# Altium PCB CBU-PCB.PcbDoc (part 1 of 2)
Units mm, origin at the board's own origin, x right, y up, seen from the top; angles counter-clockwise.
Board outline 133.83 x 85.72 mm, 4 copper layers (Top, GND, PWR, Bottom), stack 1.585 mm thick; 138 components, 74 nets, 476 pads, 131 vias.
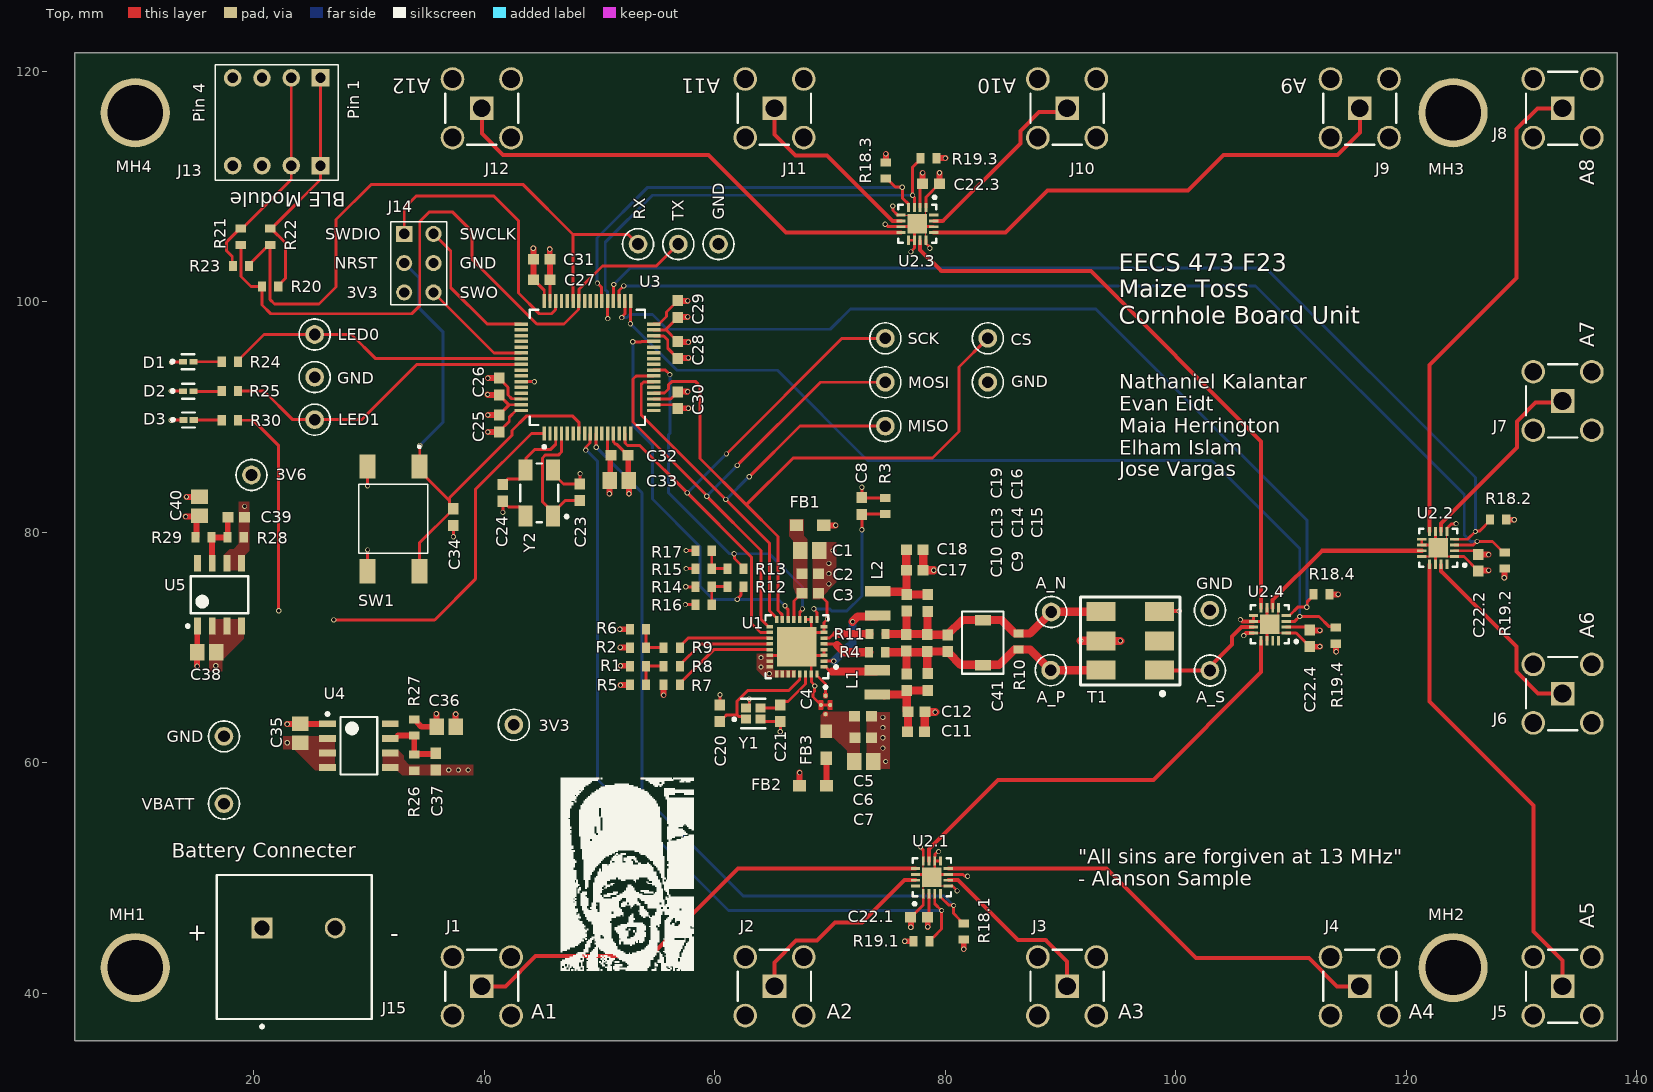
[diagram p0: Top view]
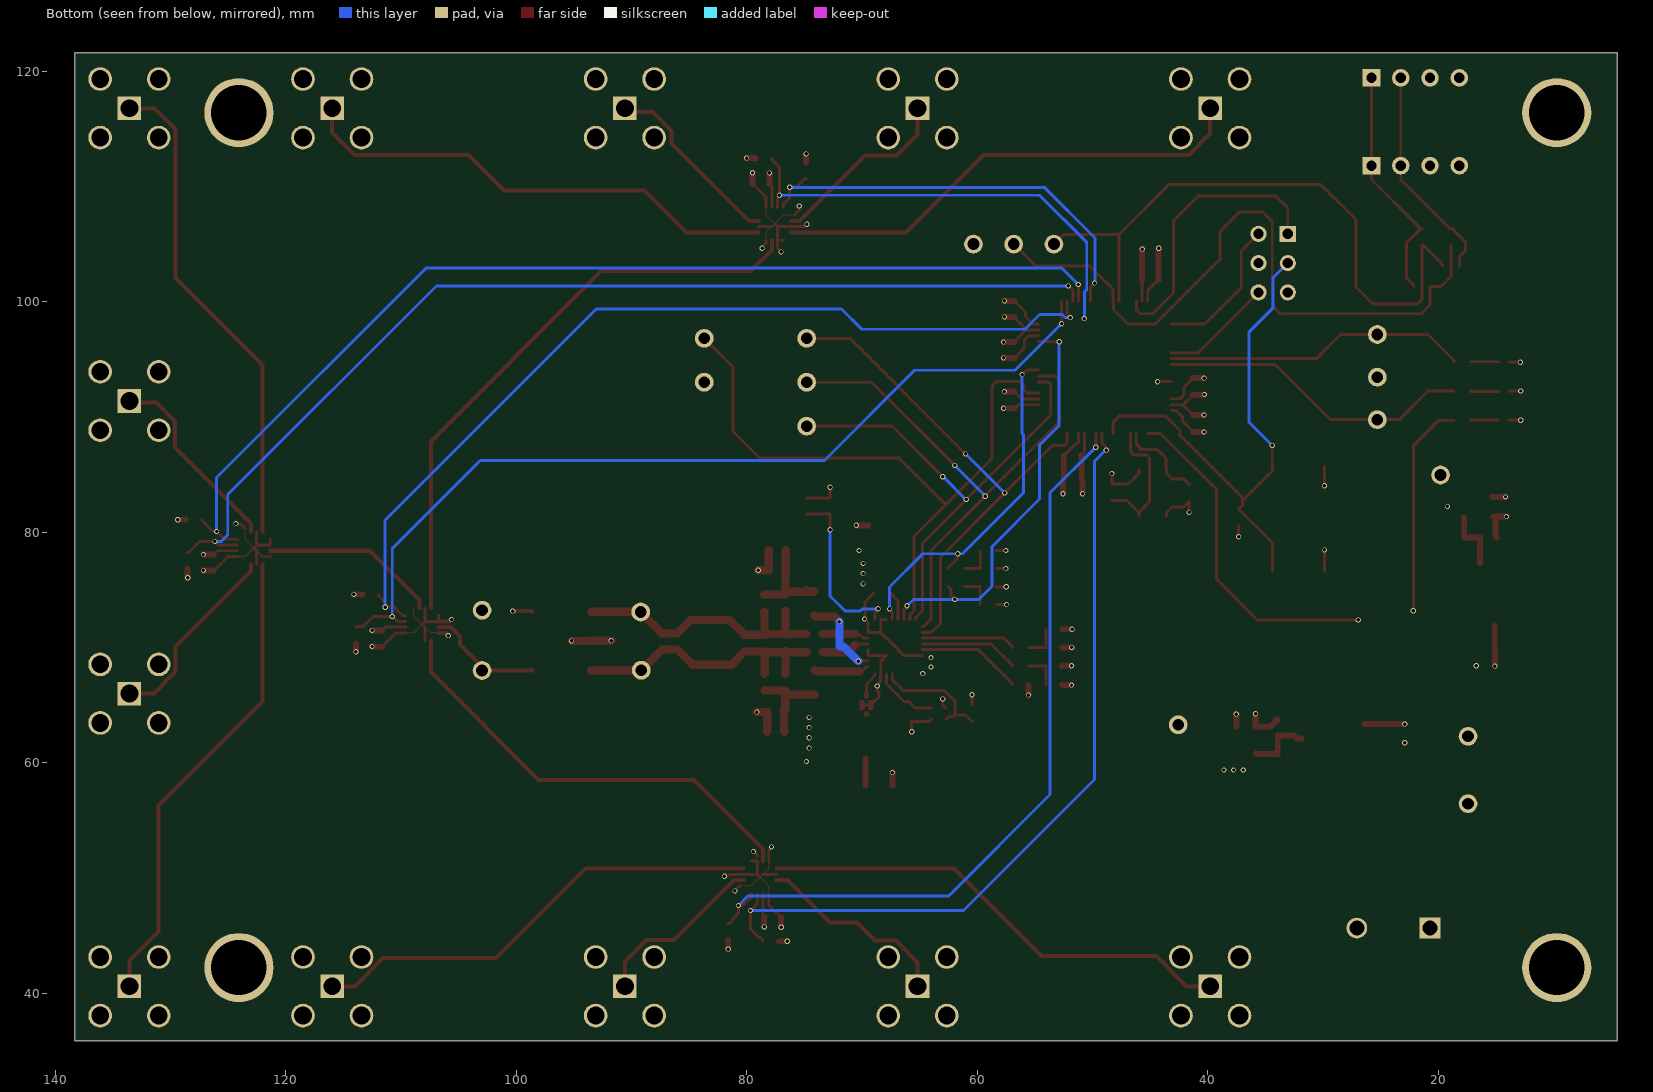
[diagram p1: Bottom view, seen from below]
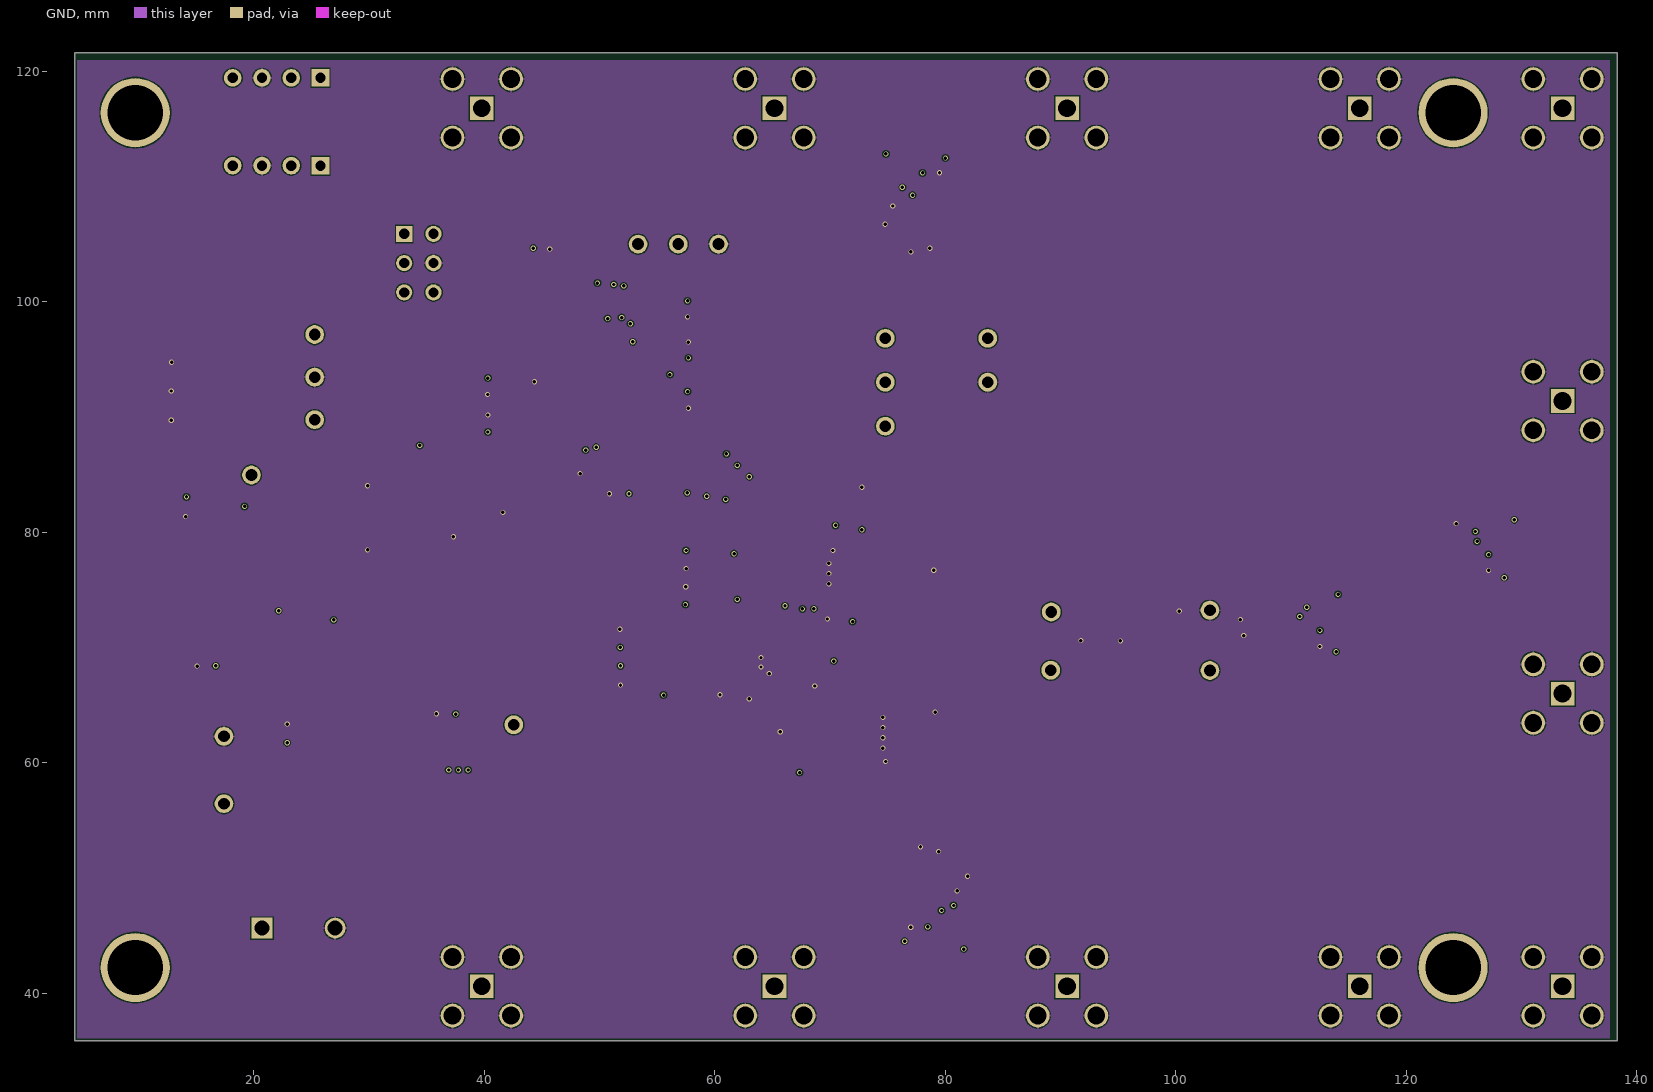
[diagram p2: GND]
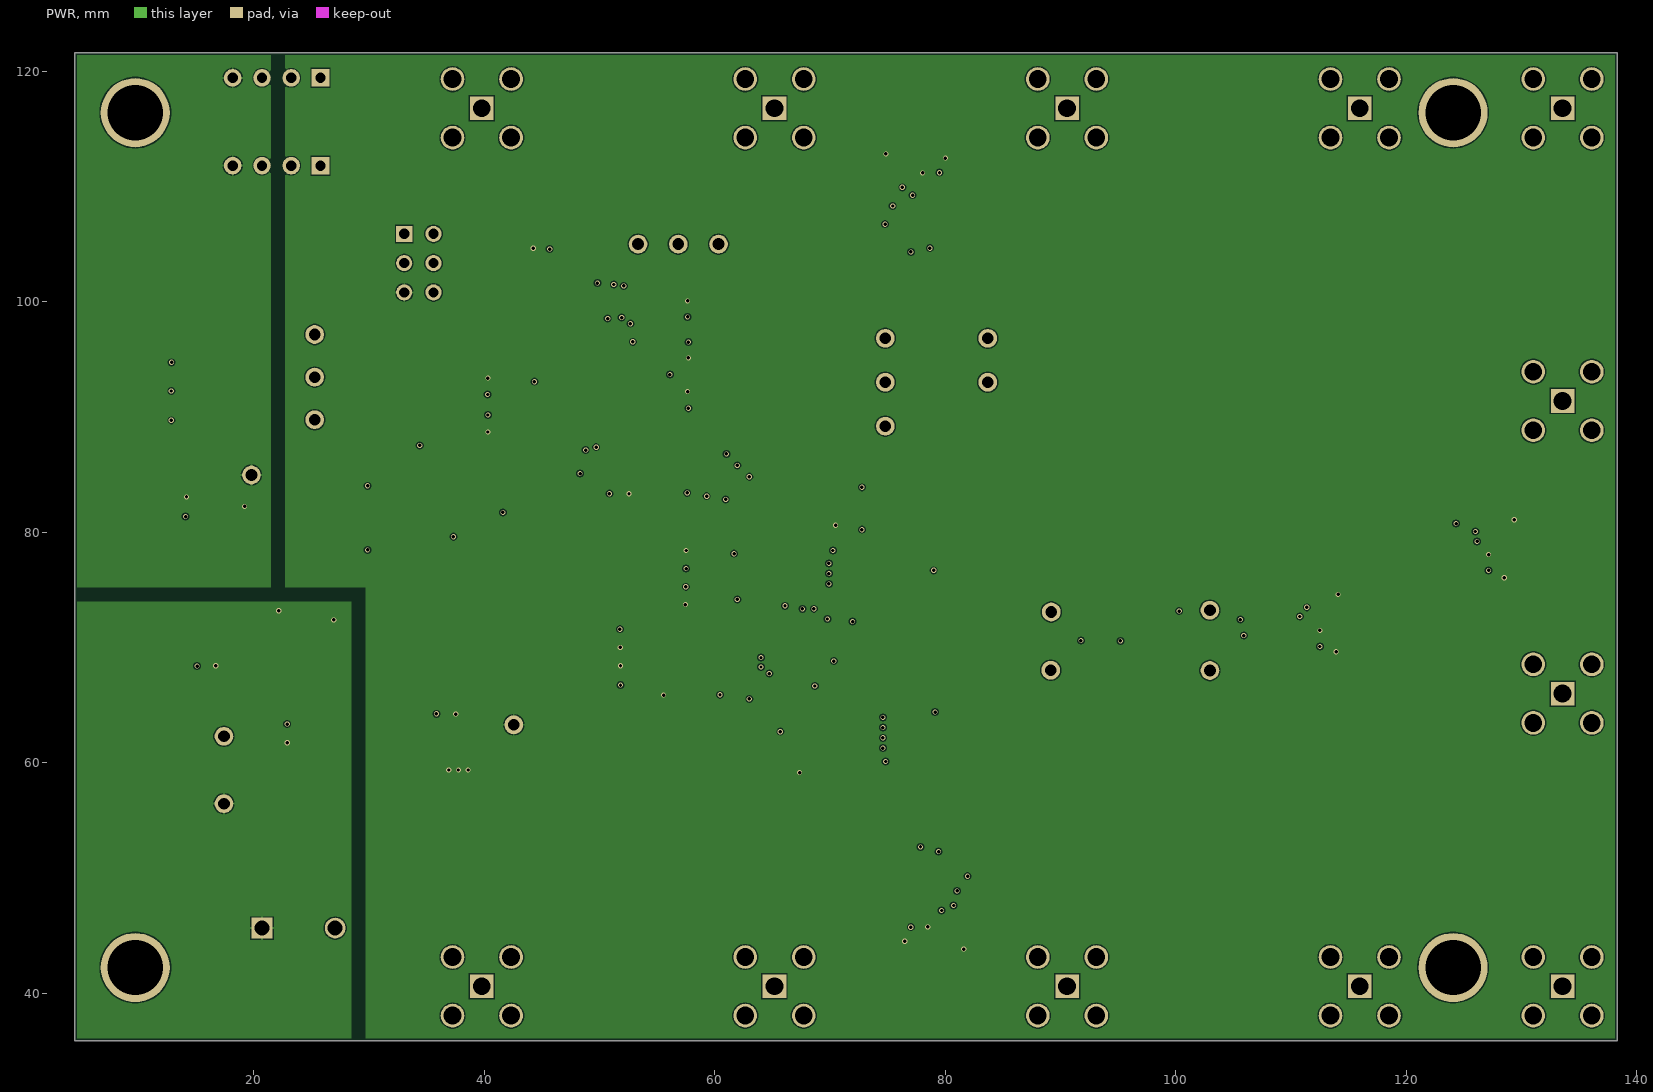
[diagram p3: PWR]
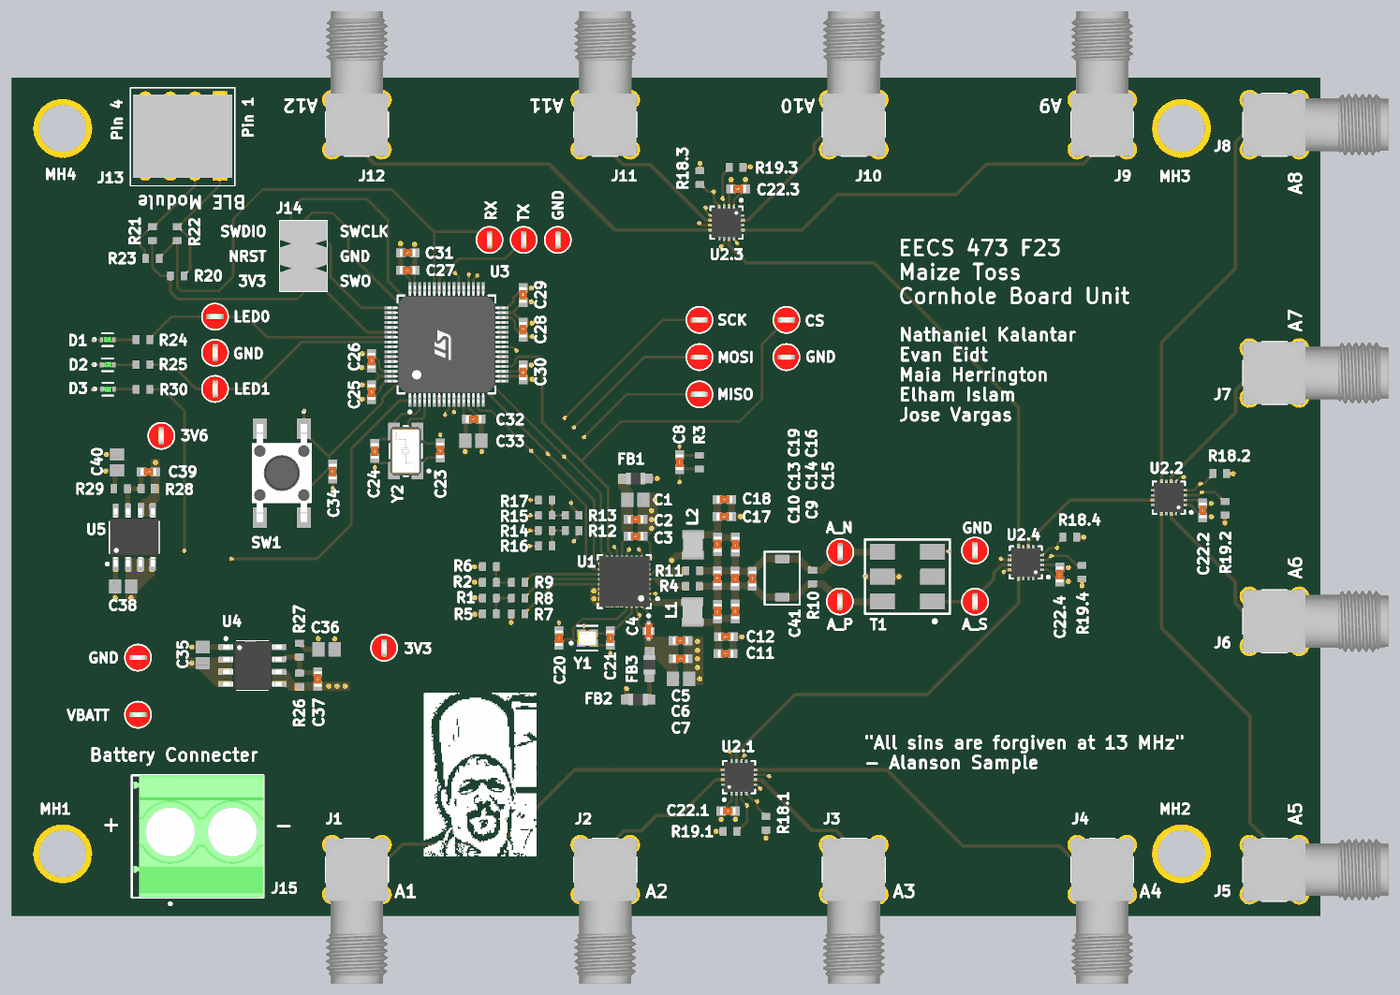
[diagram p5: 3D render of the assembled board from above, using the file's embedded part models]

## Layer stack, top to bottom
Top Solder: solder mask 0.0102, Solder Resist, Dk 3.5
Top: signal copper 0.035
Dielectric 2: prepreg 0.2104, PP-006, Dk 4.1
GND: signal copper 0.0152
Core: core 1.064, FR-4, Dk 4.8
PWR: signal copper 0.0152
Dielectric 3: prepreg 0.2104, PP-006, Dk 4.1
Bottom: signal copper 0.035
Bottom Solder: solder mask 0.0102, Solder Resist, Dk 3.5

## Board outline
4.47,35.865 138.303,35.865 138.303,121.59 4.47,121.59

## Design rules (kind name [scope] priority, off if disabled: settings)
BoardOutlineClearance [All] p1: gap=0.2 ignorepadtopadclearanceinfootprint=FALSE
Clearance Clearance_DiffNets [All] p1: gap=0.102 ignorepadtopadclearanceinfootprint=FALSE except(0.09: Arc-Arc Arc-Track Track-Track; 0.127: SMDPad-SMDPad; 0.15: SMDPad-Text THPad-Text; 0.2: Arc-SMDPad Arc-THPad Track-SMDPad Track-THPad; 0.254: Arc-Via Track-Via; 0.33: Arc-Hole Track-Hole; 0.5: SMDPad-THPad SMDPad-Hole THPad-THPad THPad-Via THPad-Hole Via-Hole)
Clearance Clearance_SameNets [All] p2: gap=0.102 ignorepadtopadclearanceinfootprint=FALSE except(0.254: Via-Via)
ComponentClearance [All] p1: gap=0.102 collisioncheckmode=3 verticalgap=0.102 showdistances=TRUE
DiffPairsRouting DiffPair_DiffPairsRouting [InDifferentialPair ('ANTENNA')] p1: maxlimit=0.254 minlimit=0.102 mostfreqgap=0.102 toplayer_minwidth=0.721 toplayer_maxwidth=0.721 toplayer_prefwidth=0.721 midlayer1_minwidth=0.721 midlayer1_maxwidth=0.721 midlayer1_prefwidth=0.721 midlayer2_minwidth=0.721 midlayer2_maxwidth=0.721 midlayer2_prefwidth=0.721 bottomlayer_minwidth=0.721 bottomlayer_maxwidth=0.721 bottomlayer_prefwidth=0.721 maxuncoupledlength=12.7
DiffPairsRouting [All] p2: maxlimit=0.102 minlimit=0.102 mostfreqgap=0.102 toplayer_minwidth=0.102 toplayer_maxwidth=1816.048 toplayer_prefwidth=0.102 midlayer1_minwidth=0.102 midlayer1_maxwidth=1816.048 midlayer1_prefwidth=0.102 midlayer2_minwidth=0.102 midlayer2_maxwidth=1816.048 midlayer2_prefwidth=0.102 bottomlayer_minwidth=0.102 bottomlayer_maxwidth=1816.048 bottomlayer_prefwidth=0.102 maxuncoupledlength=12.7
Height [All] p1: minheight=0 maxheight=1816.048 prefheight=12.7
HoleSize [All] p1: absolutevalues=TRUE maxlimit=6.3 minlimit=0.3 maxpercent=80.000 minpercent=20.000
HoleToHoleClearance [All] p1: gap=0.25 allowstackedmicrovias=FALSE
MatchedLengths DiffPair_MatchedLengths [InDifferentialPair ('ANTENNA')] p1: tolerance=25.4 checknetsindiffpair=FALSE checkdiffpairvsdiffpair=TRUE checkxsignals=TRUE checkothers=TRUE
MinimumAnnularRing [All] p1: minimumring=0.074
MinimumSolderMaskSliver [All] p1: minsoldermaskwidth=0
PlaneClearance [All] p1: clearance=0.102
PlaneConnect PlaneConnectPowerPads [InPadClass('PowerPads')] p1: planeconnectstyle=Direct reliefexpansion=0.508 reliefentries=4 reliefconductorwidth=0.254 reliefairgap=0.254
PlaneConnect [All] p2: pad.planeconnectstyle=Relief pad.reliefexpansion=0.3 pad.reliefentries=4 pad.reliefconductorwidth=0.102 pad.reliefairgap=0.102 via.planeconnectstyle=Direct via.reliefexpansion=0.3 via.reliefentries=4 via.reliefconductorwidth=0.127 via.reliefairgap=0.127
PolygonConnect PolygonConnect_GND [InNet('GND') Or InNet('3V3') Or InNet('3V6') Or InNet('VBATT') Or InNet('NetC4_3') Or InNet('NetC1_1')] p1: thpad.connectstyle=Relief thpad.reliefconductorwidth=0.203 thpad.reliefentries=4 thpad.polygonreliefangle="90 Angle" thpad.airgapwidth=0.102 smdpad.connectstyle=Direct smdpad.reliefconductorwidth=0.102 smdpad.reliefentries=4 smdpad.polygonreliefangle="90 Angle" smdpad.airgapwidth=0.102 via.connectstyle=Direct via.reliefconductorwidth=0.102 via.reliefentries=4 via.polygonreliefangle="90 Angle" via.airgapwidth=0.102
PolygonConnect PolygonConnectPowerPads [All vs (InPadClass('PowerPads'))] p2: connectstyle=Direct reliefconductorwidth=0.254 reliefentries=4 polygonreliefangle="90 Angle" airgapwidth=0.254
PolygonConnect [All] p3: thpad.connectstyle=Relief thpad.reliefconductorwidth=0.203 thpad.reliefentries=4 thpad.polygonreliefangle="90 Angle" thpad.airgapwidth=0.102 smdpad.connectstyle=Relief smdpad.reliefconductorwidth=0.203 smdpad.reliefentries=4 smdpad.polygonreliefangle="90 Angle" smdpad.airgapwidth=0.102 via.connectstyle=Direct via.reliefconductorwidth=0.127 via.reliefentries=4 via.polygonreliefangle="90 Angle" via.airgapwidth=0.127
RoutingVias [All] p1: holewidth=0.3 width=0.45 viastyle="Through Hole" minholewidth=0.3 minwidth=0.45 maxholewidth=6.3 maxwidth=6.55
SilkToSilkClearance [All] p1: silktosilkclearance=0
SilkToSolderMaskClearance [IsPad] p1: minsilkscreentomaskgap=0.102 clearancetoexposedcopper=TRUE
SolderMaskExpansion [All] p1: expansion=0.038 istentingtop=FALSE
Width Width_1 [Not InNetClass('50OhmMicrostrip')] p1: maxlimit=1.27 minlimit=0.102 preferedwidth=0.254 minimp=50.000000 maximp=50.000000 favimp=50.000000
20 further rules are at their usual default settings.

## Classes and differential pairs
component class CBU: MH1 MH2 MH3 MH4
channel class "RF Switch": Switch1 Switch2 Switch3 Switch4
net class SEL[7..0]: SEL0 SEL1 SEL2 SEL3 SEL4 SEL5 SEL6 SEL7
net class RF[11..0]: RF0 RF1 RF2 RF3 RF4 RF5 RF6 RF7 RF8 RF9 RF10 RF11
component class "Switch Network": A_N A_P A_S T1
component class Switch4: C22.4 R18.4 R19.4 U2.4
component class Switch3: C22.3 R18.3 R19.3 U2.3
component class Switch2: C22.2 R18.2 R19.2 U2.2
component class Switch1: C22.1 R18.1 R19.1 U2.1
component class "RFID Reader": C1 C2 C3 C4 C5 C6 C7 C8 C9 C10 C11 C12 C13 C14 C15 C16 C17 C18 C19 C20 C21 C41 FB1 FB2 FB3 L1 L2 R1 R2 R3 R4 R5 R6 R7 R8 R9 R10 R11 R12 R13 R14 R15 R16 R17 U1 Y1
component class "Power Regulation": 3V6 C35 C36 C37 C38 C39 C40 D3 J15 R26 R27 R28 R29 R30 U4 U5 VBATT
component class Microcontroller: C23 C24 C25 C26 C27 C28 C29 C30 C31 C32 C33 C34 CS D1 D2 GND J13 J14 LED0 LED1 MISO MOSI R20 R21 R22 R23 R24 R25 Rx SCK SW1 Tx U3 Y2
component class "Antenna Connectors": J1 J2 J3 J4 J5 J6 J7 J8 J9 J10 J11 J12
differential pair ANTENNA: +ANTENNA_P -ANTENNA_N

## Components (designator, comment, footprint, x,y, rotation, side; value= is the part's Value field where it differs from the comment)
3V3 "5000" FP-5000-MFG 42.557,63.283 r90 top (schematic designator TP14)
3V6 "5000" FP-5000-MFG 19.787,84.963 r90 top (schematic designator TP15)
A_N "5000" FP-5000-MFG 89.205,73.076 r90 top (schematic designator TP18)
A_P "5000" FP-5000-MFG 89.154,68.021 r90 top (schematic designator TP16)
A_S "5000" FP-5000-MFG 102.972,67.996 r90 top (schematic designator TP17)
C1 "Ceramic Capacitor 0805" FP-0805-Capacitor-CL21-IPC_B 68.25,78.41 r0 top value=1u
C2 "Ceramic Capacitor 0603" FP-0603-Capacitor-CL10-IPC_B 68.275,76.412 r0 top value=100n
C3 "Ceramic Capacitor 0603" FP-0603-Capacitor-CL10-IPC_B 68.275,74.698 r0 top value=10n
C4 "NFM18PS105R0J3D" FP-NFM18-0_1-e0_05_0_35-MFG 69.61,65.004 r270 top
C5 "Ceramic Capacitor 0603" FP-0603-Capacitor-CL10-IPC_B 72.866,64.008 r0 top value=10n
C6 "Ceramic Capacitor 0603" FP-0603-Capacitor-CL10-IPC_B 72.882,62.179 r0 top value=100n
C7 "Ceramic Capacitor 0805" FP-0805-Capacitor-CL21-IPC_B 72.923,60.096 r0 top value=1u
C8 "Ceramic Capacitor 0603" FP-0603-Capacitor-CL10-IPC_B 72.771,82.271 r270 top value=10n
C9 "Ceramic Capacitor 0603" FP-0603-Capacitor-CL10-IPC_B 78.461,66.997 r90 top value=NC
C10 "Ceramic Capacitor 0603" FP-0603-Capacitor-CL10-IPC_B 76.657,66.981 r90 top value=47p
C11 "Ceramic Capacitor 0603" FP-0603-Capacitor-CL10-IPC_B 77.47,62.679 r0 top value=100p
C12 "Ceramic Capacitor 0603" FP-0603-Capacitor-CL10-IPC_B 77.505,64.406 r0 top value=100p
C13 "Ceramic Capacitor 0603" FP-0603-Capacitor-CL10-IPC_B 76.632,70.401 r270 top value=82p
C14 "Ceramic Capacitor 0603" FP-0603-Capacitor-CL10-IPC_B 78.435,70.375 r90 top value=NC
C15 "Ceramic Capacitor 0603" FP-0603-Capacitor-CL10-IPC_B 80.213,70.359 r90 top value=NC
C16 "Ceramic Capacitor 0603" FP-0603-Capacitor-CL10-IPC_B 78.486,73.845 r270 top value=47p
C17 "Ceramic Capacitor 0603" FP-0603-Capacitor-CL10-IPC_B 77.349,76.708 r180 top value=100p
C18 "Ceramic Capacitor 0603" FP-0603-Capacitor-CL10-IPC_B 77.359,78.461 r180 top value=100p
C19 "Ceramic Capacitor 0603" FP-0603-Capacitor-CL10-IPC_B 76.657,73.871 r270 top value=NC
C20 "Ceramic Capacitor 0603" FP-0603-Capacitor-CL10-IPC_B 60.441,64.28 r90 top value=10p
C21 "Ceramic Capacitor 0603" FP-0603-Capacitor-CL10-IPC_B 65.673,64.29 r270 top value=10p
C22.1 "Ceramic Capacitor 0603" FP-0603-Capacitor-CL10-IPC_B 77.724,46.584 r180 top value=100n (schematic designator C22)
C22.2 "Ceramic Capacitor 0603" FP-0603-Capacitor-CL10-IPC_B 126.263,77.343 r270 top value=100n (schematic designator C22)
C22.3 "Ceramic Capacitor 0603" FP-0603-Capacitor-CL10-IPC_B 78.765,110.221 r0 top value=100n (schematic designator C22)
C22.4 "Ceramic Capacitor 0603" FP-0603-Capacitor-CL10-IPC_B 111.633,70.79 r270 top value=100n (schematic designator C22)
C23 "Ceramic Capacitor 0603" FP-0603-Capacitor-CL10-IPC_B 48.297,83.464 r90 top value=16p
C24 "Ceramic Capacitor 0603" FP-0603-Capacitor-CL10-IPC_B 41.605,83.414 r270 top value=16p
C25 "Ceramic Capacitor 0603" FP-0603-Capacitor-CL10-IPC_B 41.275,89.433 r90 top value=100n
C26 "Ceramic Capacitor 0603" FP-0603-Capacitor-CL10-IPC_B 41.275,92.647 r270 top value=100n
C27 "Ceramic Capacitor 0603" FP-0603-Capacitor-CL10-IPC_B 44.983,101.905 r0 top value=100n
C28 "Ceramic Capacitor 0603" FP-0603-Capacitor-CL10-IPC_B 56.769,99.365 r270 top value=100n
C29 "Ceramic Capacitor 0603" FP-0603-Capacitor-CL10-IPC_B 56.769,95.809 r90 top value=100n
C30 "Ceramic Capacitor 0603" FP-0603-Capacitor-CL10-IPC_B 56.769,91.456 r270 top value=100n
C31 "Ceramic Capacitor 0603" FP-0603-Capacitor-CL10-IPC_B 44.983,103.683 r0 top value=4.7n
C32 "Ceramic Capacitor 0603" FP-0603-Capacitor-CL10-IPC_B 51.724,86.665 r180 top value=10n
C33 "Ceramic Capacitor 0805" FP-0805-Capacitor-CL21-IPC_B 51.689,84.48 r180 top value=1u
C34 "Ceramic Capacitor 0603" FP-0603-Capacitor-CL10-IPC_B 37.313,81.305 r270 top value=100n
C35 "Ceramic Capacitor 0805" FP-0805-Capacitor-CL21-IPC_B 24.028,62.535 r90 top value=1u
C36 "Ceramic Capacitor 0603" FP-0603-Capacitor-CL10-IPC_B 35.789,60.087 r90 top value=68p
C37 "Ceramic Capacitor 0805" FP-0805-Capacitor-CL21-IPC_B 36.678,63.119 r180 top value=1u
C38 "Ceramic Capacitor 0805" FP-0805-Capacitor-CL21-IPC_B 15.888,69.571 r180 top value=1u
C39 "Ceramic Capacitor 0603" FP-0603-Capacitor-CL10-IPC_B 18.466,81.28 r180 top value=68p
C40 "Ceramic Capacitor 0805" FP-0805-Capacitor-CL21-IPC_B 15.265,82.245 r270 top value=1u
C41 "JZ500" JZXXX_Trim_Capacitor 83.261,70.409 r270 top
CS "5000" FP-5000-MFG 83.693,96.825 r0 top (schematic designator TP4)
D1 "APG1005CGC-T" FP-APG1005CGC-T-MFG 14.293,94.793 r0 top
D2 "APG1005CGC-T" FP-APG1005CGC-T-MFG 14.3,92.227 r0 top
D3 "APG1005CGC-T" FP-APG1005CGC-T-MFG 14.326,89.738 r0 top
FB1 "742792042" 742792042 68.275,80.594 r0 top
FB2 "742792042" 742792042 68.518,57.991 r180 top
FB3 "742792042" 742792042 69.686,61.547 r270 top
GND "5000" FP-5000-MFG 102.972,73.228 r90 top (schematic designator TP19)
GND "5000" FP-5000-MFG 25.273,93.459 r90 top (schematic designator TP13)
GND "5000" FP-5000-MFG 17.399,62.281 r0 top (schematic designator TP11)
GND "5000" FP-5000-MFG 60.325,105.004 r90 top (schematic designator TP8)
GND "5000" FP-5000-MFG 83.693,93.015 r0 top (schematic designator TP5)
J1 "731000114" 731000114_V 39.776,40.589 r90 top
J2 "731000114" 731000114_V 65.176,40.589 r90 top
J3 "731000114" 731000114_V 90.576,40.589 r90 top
J4 "731000114" 731000114_V 115.976,40.589 r90 top
J5 "731000114" 731000114_V 133.579,40.589 r180 top
J6 "731000114" 731000114_V 133.579,65.989 r180 top
J7 "731000114" 731000114_V 133.579,91.389 r180 top
J8 "731000114" 731000114_V 133.579,116.789 r180 top
J9 "731000114" 731000114_V 115.976,116.789 r270 top
J10 "731000114" 731000114_V 90.576,116.789 r270 top
J11 "731000114" 731000114_V 65.176,116.789 r270 top
J12 "731000114" 731000114_V 39.776,116.789 r270 top
J13 "0901481104" 0901481104 25.781,111.811 r0 top
J14 "5-146256-3" TE_5-146256-3 34.315,103.353 r270 top
J15 "1714955" 1714955 23.876,45.644 r0 top
L1 "744762256A" 744762256A 74.092,66.963 r270 top
L2 "744762256A" 744762256A 74.143,73.821 r90 top
LED0 "5000" FP-5000-MFG 25.273,97.155 r0 top (schematic designator TP9)
LED1 "5000" FP-5000-MFG 25.273,89.764 r90 top (schematic designator TP10)
MH1 "M4 Mounting Hole" "M4 Mounting Hole" 9.703,42.215 r0 top
MH2 "M4 Mounting Hole" "M4 Mounting Hole" 124.079,42.215 r0 top
MH3 "M4 Mounting Hole" "M4 Mounting Hole" 124.079,116.408 r0 top
MH4 "M4 Mounting Hole" "M4 Mounting Hole" 9.703,116.408 r0 top
MISO "5000" FP-5000-MFG 74.803,89.205 r0 top (schematic designator TP2)
MOSI "5000" FP-5000-MFG 74.803,93.015 r0 top (schematic designator TP3)
R1 "RC0603FR-072K2L" RESC1608X55X25NL10T15 53.326,68.368 r180 top value=NC
R2 "RC0603FR-072K2L" RESC1608X55X25NL10T15 53.326,69.977 r180 top value=0
R3 "RC0603FR-072K2L" RESC1608X55X25NL10T15 74.803,82.271 r270 top value=NC
R4 "RC0603FR-072K2L" RESC1608X55X25NL10T15 74.092,69.588 r180 top value=330
R5 "RC0603FR-072K2L" RESC1608X55X25NL10T15 53.326,66.76 r0 top value=0
R6 "RC0603FR-072K2L" RESC1608X55X25NL10T15 53.326,71.586 r0 top value=NC
R7 "RC0603FR-072K2L" RESC1608X55X25NL10T15 56.261,66.76 r180 top value=3.3k
R8 "RC0603FR-072K2L" RESC1608X55X25NL10T15 56.261,68.368 r180 top value=3.3k
R9 "RC0603FR-072K2L" RESC1608X55X25NL10T15 56.261,69.977 r180 top value=3.3k
R10 "RC0603FR-072K2L" RESC1608X55X25NL10T15 86.36,70.51 r270 top value=NC
R11 "RC0603FR-072K2L" RESC1608X55X25NL10T15 74.117,71.163 r180 top value=330
R12 "RC0603FR-072K2L" RESC1608X55X25NL10T15 61.787,75.273 r180 top value=3.3k
R13 "RC0603FR-072K2L" RESC1608X55X25NL10T15 61.787,76.832 r180 top value=3.3k
R14 "RC0603FR-072K2L" RESC1608X55X25NL10T15 59.035,75.273 r0 top value=NC
R15 "RC0603FR-072K2L" RESC1608X55X25NL10T15 59.035,76.832 r0 top value=NC
R16 "RC0603FR-072K2L" RESC1608X55X25NL10T15 59.035,73.713 r180 top value=0
R17 "RC0603FR-072K2L" RESC1608X55X25NL10T15 59.035,78.392 r180 top value=0
R18.1 "RC0603FR-072K2L" RESC1608X55X25NL10T15 81.61,45.331 r270 top value=1M (schematic designator R18)
R18.2 "RC0603FR-072K2L" RESC1608X55X25NL10T15 127.991,81.102 r0 top value=1M (schematic designator R18)
R18.3 "RC0603FR-072K2L" RESC1608X55X25NL10T15 74.832,111.388 r90 top value=1M (schematic designator R18)
R18.4 "RC0603FR-072K2L" RESC1608X55X25NL10T15 112.657,74.6 r0 top value=1M (schematic designator R18)
R19.1 "RC0603FR-072K2L" RESC1608X55X25NL10T15 77.927,44.501 r180 top value=1M (schematic designator R19)
R19.2 "RC0603FR-072K2L" RESC1608X55X25NL10T15 128.549,77.546 r270 top value=1M (schematic designator R19)
R19.3 "RC0603FR-072K2L" RESC1608X55X25NL10T15 78.537,112.446 r0 top value=1M (schematic designator R19)
R19.4 "RC0603FR-072K2L" RESC1608X55X25NL10T15 113.894,71.018 r270 top value=1M (schematic designator R19)
R20 "RC0603FR-072K2L" RESC1608X55X25NL10T15 21.412,101.321 r180 top value=NC
R21 "RC0603FR-072K2L" RESC1608X55X25NL10T15 18.872,105.639 r90 top value=0
R22 "RC0603FR-072K2L" RESC1608X55X25NL10T15 21.412,105.639 r270 top value=0
R23 "RC0603FR-072K2L" RESC1608X55X25NL10T15 18.872,103.099 r180 top value=NC
R24 "RC0603FR-072K2L" RESC1608X55X25NL10T15 17.907,94.793 r0 top value=1k
R25 "RC0603FR-072K2L" RESC1608X55X25NL10T15 17.907,92.253 r0 top value=1k
R26 "RC0603FR-072K2L" RESC1608X55X25NL10T15 33.909,59.995 r270 top value=51.1k
R27 "RC0603FR-072K2L" RESC1608X55X25NL10T15 33.909,63.043 r270 top value=31.2k
R28 "RC0603FR-072K2L" RESC1608X55X25NL10T15 18.415,79.553 r0 top value=51.1k
R29 "RC0603FR-072K2L" RESC1608X55X25NL10T15 15.621,79.553 r0 top value=27.1k
R30 "RC0603FR-072K2L" RESC1608X55X25NL10T15 17.907,89.713 r0 top value=1k
RX "5000" FP-5000-MFG 53.34,105.004 r90 top (schematic designator TP7)
SCK "5000" FP-5000-MFG 74.803,96.825 r0 top (schematic designator TP1)
SW1 "TS04-66-50-BK-260-SMT" SW_TS04-66-50-BK-260-SMT 32.106,81.153 r270 top
T1 "ADT1-6T+" ADT1-6T+ 93.524,68.021 r90 top
TX "5000" FP-5000-MFG 56.832,105.004 r90 top (schematic designator TP6)
U1 "ST25R95-VMD5T" ST25R95-VMD5T 67.121,70.056 r180 top
U2.1 "PE42440MLBB-Z" PE42440MLBB-Z 78.842,50.046 r90 top (schematic designator U2)
U2.2 "PE42440MLBB-Z" PE42440MLBB-Z 122.784,78.638 r180 top (schematic designator U2)
U2.3 "PE42440MLBB-Z" PE42440MLBB-Z 77.576,106.763 r270 top (schematic designator U2)
U2.4 "PE42440MLBB-Z" PE42440MLBB-Z 108.171,72.009 r180 top (schematic designator U2)
U3 "STM32L452RET6P" FP-STM32L452RET6P-MFG 48.946,94.31 r90 top
U4 "NCP3334DADJR2G" NCP3334DADJR2G 29.108,61.468 r0 top
U5 "NCP3334DADJR2G" NCP3334DADJR2G 17.018,74.574 r90 top
VBATT "5000" FP-5000-MFG 17.399,56.439 r0 top (schematic designator TP12)
Y1 "ABM11W-27.1200MHZ-6-D1X-T3" FP-ABM11W-MFG 63.336,64.259 r0 top
Y2 "ABM3B-8.000MHZ-B2-T" FP-ABM3B-MFG 44.764,83.407 r90 top

## Footprints (in the part's own frame and the unit in brackets; to place one, negate y for a bottom-side part, rotate by r counter-clockwise, add the part's x,y. Pads: shape width x height; smd on the part's side, far side on the other; paste and mask are expansions set on the pad)
1714955 [mm] "Terminal Block, 2-Leads, Body 12.7x12.5mm, Pitch 6.35mm"
  rect 1.8x1.8 hole 1.3: 1(-3.175,0)
  round 1.8 hole 1.3: 2(3.175,0)
  silkscreen extent -7.11,-8.67 6.35,4.6, body extent -6.92,-7.9 6.35,4.6, height 21.51
731000114_V [mm] "Connector, 5-Leads, Body 14.8x6.35mm, Pitch 2.54mm"
  rect 2.05x2.05 hole 1.54: 1(0,0)
  round 2.05 hole 1.54: 2(-2.54,2.54) 3(-2.54,-2.54) 4(2.54,-2.54) 5(2.54,2.54)
  silkscreen extent -1.26,-3.17 3.17,3.17, body extent -11.62,-3.17 3.18,3.18, height 9.57
742792042 [mm] "Chip Inductor, 2-Leads, Body 2.0x1.2mm"
  rect 1.15x1 smd: 1(-1.175,0) 2(1.175,0)
  body extent -1,-0.6 1,0.6, height 0.89
744762256A [mm] "SMD Wire Wound Ceramic Inductor, body 2.50x2.00mm"
  rect 0.9x2.2 smd: 1(-1.05,0) 2(1.05,0)
  body extent -1.25,-1 1.25,1, height 1.12
0901481104 [mil] "4-pin right angle THT 0.1\" pitch header with strain relief"
  rect 60x60 hole 35: 1(0,0) 1(0,300)
  round 60 hole 35: 2(-100,0) 2(-100,300) 3(-200,0) 3(-200,300) 4(-300,0) 4(-300,300)
  silkscreen extent -360,-50 60,345, body extent -350,-18 50,318, height 131
ADT1-6T+ [mil]
  rect 65x100 smd: 1(0,-200) 2(100,-200) 3(200,-200) 4(200,0) 5(100,0) 6(0,0)
  silkscreen extent -85,-270 250,70
FP-0603-Capacitor-CL10-IPC_B [mm]
  rect 0.958x0.912 smd paste+0 mask+0: 1(-0.727,0) 2(0.727,0)
  body extent -1.46,-0.71 1.46,0.71, height 0.25
FP-0805-Capacitor-CL21-IPC_B [mm]
  rect 1.255x1.456 smd paste+0 mask+0: 1(-0.826,0) 2(0.826,0)
  body extent -1.7,-0.98 1.7,0.98, height 0.25
FP-5000-MFG [mil]
  round 64 hole 40: 1(0,0)
  silkscreen extent -53,-53 53,53, body extent -50,-50 50,50, height 180
FP-ABM3B-MFG [mm] "Crystal 4-SMD, No Lead"
  rect 1.8x1.2 smd paste+0 mask+0: 1(-2,-1.2) 2(2,-1.2) 3(2,1.2) 4(-2,1.2)
  silkscreen extent -2.55,-2.5 2.55,1.65, body extent -3,-1.9 3,1.9, height 0.25
FP-ABM11W-MFG [mm]
  rect 0.875x0.775 smd paste+0 mask+0: 1(-0.637,-0.487) 2(0.637,-0.487) 3(0.637,0.487) 4(-0.637,0.487)
  silkscreen extent -1.77,-1.28 1.05,1.28, body extent -1.17,-0.97 1.17,0.97, height 0.25
FP-APG1005CGC-T-MFG [mm]
  rect 0.7x0.5 smd paste+0 mask+0: 1(-0.45,0) 2(0.45,0)
  silkscreen extent -1.47,-0.65 0.55,0.65, body extent -0.9,-0.4 0.9,0.4, height 0.25
FP-NFM18-0_1-e0_05_0_35-MFG [mm]
  round 0.36 smd paste+0 mask+0: 1(-0.8,0) 2(0,0.4) 2(0,-0.4) 3(0.8,0)
  Top region: -1,-0.2 -1,0.2 -0.65,0.2 -0.6,0.15 -0.6,-0.15 -0.65,-0.2 -1,-0.2
  Top region: 1,-0.2 1,0.2 0.65,0.2 0.6,0.15 0.6,-0.15 0.65,-0.2 1,-0.2
  Top region: -0.4,0.6 0.4,0.6 0.4,0.25 0.35,0.2 -0.35,0.2 -0.4,0.25 -0.4,0.6
  Top region: -0.4,-0.6 0.4,-0.6 0.4,-0.25 0.35,-0.2 -0.35,-0.2 -0.4,-0.25 -0.4,-0.6
  silkscreen extent -1.67,-0.12 -1.43,0.13, body extent -1.1,-0.7 1.1,0.7, height 0.25
FP-STM32L452RET6P-MFG [mm]
  rect 1.2x0.3 smd paste+0 mask+0: 1(-5.75,3.75) 2(-5.75,3.25) 3(-5.75,2.75) 4(-5.75,2.25) 5(-5.75,1.75) 6(-5.75,1.25) 7(-5.75,0.75) 8(-5.75,0.25) 9(-5.75,-0.25) 10(-5.75,-0.75) 11(-5.75,-1.25) 12(-5.75,-1.75) 13(-5.75,-2.25) 14(-5.75,-2.75) 15(-5.75,-3.25) 16(-5.75,-3.75) 33(5.75,-3.75) 34(5.75,-3.25) 35(5.75,-2.75) 36(5.75,-2.25) 37(5.75,-1.75) 38(5.75,-1.25) 39(5.75,-0.75) 40(5.75,-0.25) 41(5.75,0.25) 42(5.75,0.75) 43(5.75,1.25) 44(5.75,1.75) 45(5.75,2.25) 46(5.75,2.75) 47(5.75,3.25) 48(5.75,3.75)
  rect 0.3x1.2 smd paste+0 mask+0: 17(-3.75,-5.75) 18(-3.25,-5.75) 19(-2.75,-5.75) 20(-2.25,-5.75) 21(-1.75,-5.75) 22(-1.25,-5.75) 23(-0.75,-5.75) 24(-0.25,-5.75) 25(0.25,-5.75) 26(0.75,-5.75) 27(1.25,-5.75) 28(1.75,-5.75) 29(2.25,-5.75) 30(2.75,-5.75) 31(3.25,-5.75) 32(3.75,-5.75) 49(3.75,5.75) 50(3.25,5.75) 51(2.75,5.75) 52(2.25,5.75) 53(1.75,5.75) 54(1.25,5.75) 55(0.75,5.75) 56(0.25,5.75) 57(-0.25,5.75) 58(-0.75,5.75) 59(-1.25,5.75) 60(-1.75,5.75) 61(-2.25,5.75) 62(-2.75,5.75) 63(-3.25,5.75) 64(-3.75,5.75)
  silkscreen extent -7.02,-5 5,5, body extent -6.45,-6.45 6.45,6.45, height 0.25
JZXXX_Trim_Capacitor [mm] "Trimmer Capacitor Top Surface Mount"
  rect 0.9x1.4 smd: 1(1.95,0) 2(-1.95,0)
  silkscreen extent -2.7,-1.8 2.7,1.8
"M4 Mounting Hole" [mm]
  round 6 hole 4.8: 1(0,0)
NCP3334DADJR2G [mm] "SOIC, 8-Leads, Body 4.90x3.90mm, Pitch 1.27mm, IPC Medium Density"
  rect 1.45x0.6 smd: 1(-2.725,1.905) 2(-2.725,0.635) 3(-2.725,-0.635) 4(-2.725,-1.905) 5(2.725,-1.905) 6(2.725,-0.635) 7(2.725,0.635) 8(2.725,1.905)
  silkscreen extent -2.85,-2.5 1.6,2.88, body extent -3,-2.5 3,2.5, height 1.75
PE42440MLBB-Z [mm] "QFN, 16-Leads, Body 3.00x3.00mm, Pitch 0.50mm, Thermal Pad 1.70x1.70mm, IPC Medium Density"
  rect 0.8x0.25 smd: 1(-1.425,0.75) 2(-1.425,0.25) 3(-1.425,-0.25) 4(-1.425,-0.75) 9(1.425,-0.75) 10(1.425,-0.25) 11(1.425,0.25) 12(1.425,0.75)
  rect 0.25x0.8 smd: 5(-0.75,-1.425) 6(-0.25,-1.425) 7(0.25,-1.425) 8(0.75,-1.425) 13(0.75,1.425) 14(0.25,1.425) 15(-0.25,1.425) 16(-0.75,1.425)
  rect 1.7x1.7 smd: 17(0,0)
  silkscreen extent -2.42,-1.65 1.65,1.65, body extent -1.55,-1.55 1.55,1.55, height 0.8
RESC1608X55X25NL10T15 [mm] "Chip Resistor, 2-Leads, Body 1.70x0.90mm, IPC Medium Density"
  rect 0.7x0.9 smd: 1(-0.7,0) 2(0.7,0)
  body extent -0.85,-0.45 0.85,0.45, height 0.55
ST25R95-VMD5T [mm] "QFN, 32-Leads, Body 5.00x5.00mm, Pitch 0.50mm, Thermal Pad 3.45x3.45mm, IPC Medium Density"
  rect 0.6x0.3 smd: 1(-2.35,1.75) 2(-2.35,1.25) 3(-2.35,0.75) 4(-2.35,0.25) 5(-2.35,-0.25) 6(-2.35,-0.75) 7(-2.35,-1.25) 8(-2.35,-1.75) 17(2.35,-1.75) 18(2.35,-1.25) 19(2.35,-0.75) 20(2.35,-0.25) 21(2.35,0.25) 22(2.35,0.75) 23(2.35,1.25) 24(2.35,1.75)
  rect 0.3x0.6 smd: 9(-1.75,-2.35) 10(-1.25,-2.35) 11(-0.75,-2.35) 12(-0.25,-2.35) 13(0.25,-2.35) 14(0.75,-2.35) 15(1.25,-2.35) 16(1.75,-2.35) 25(1.75,2.35) 26(1.25,2.35) 27(0.75,2.35) 28(0.25,2.35) 29(-0.25,2.35) 30(-0.75,2.35) 31(-1.25,2.35) 32(-1.75,2.35)
  rect 3.45x3.45 smd: 33(0,0)
  silkscreen extent -3.53,-2.73 2.73,2.73, body extent -2.58,-2.58 2.58,2.58, height 1
SW_TS04-66-50-BK-260-SMT [mm]
  rect 2.1x1.4 smd: 1(-4.55,2.25) 2(-4.55,-2.25) 3(4.55,2.25) 4(4.55,-2.25)
  silkscreen extent -6.35,-3 3,3, body extent -5,-3 5,3, height 5.11
TE_5-146256-3 [mm]
  rect 1.398x1.398 hole 0.89: 1(-2.54,-1.27)
  round 1.398 hole 0.89: 2(-2.54,1.27) 3(0,-1.27) 4(0,1.27) 5(2.54,-1.27) 6(2.54,1.27)
  silkscreen extent -3.61,-2.44 3.61,2.44, body extent -3.61,-2.44 3.61,2.44, height 8.14

## Part data
3V3 3V6 A_N A_P A_S CS GND GND GND GND GND LED0 LED1 MISO MOSI RX SCK TX VBATT: "Red PC Test Point, Miniature Phosphor Bronze Silver Plating Through Hole Mounting Type", Connector Type="Interconnection Device", Contact Finish - Termination="Silver (Ag)", JESD-609 Code=e4, Mounting Technology=THT, Pins=1, Reach SVHC Compliant=Yes, RoHS Compliant=Yes
C1 C7 C33 C35 C37 C38 C40: "CAP CER 50V X7R 0805", Manufacturer=KEMET, Manufacturer Part Number=C0603C104K5RACTU, Package=0805, Supplier Part Number 1=CL21B105KBFNNNG, Temperature="-55°C to +125°C", Temperature Characteristic=X7R, Temperature Coefficient=30ppm/°C, Temperature Range High=+125°C, Temperature Range Low=-55°C, Tolerance=0.1, Voltage Rating="50 V", Automotive=Yes, Automotive Grade="Grade 1", Category=Cap, ComponentLink2Description=Datasheet, ComponentLink2URL=https://api.kemet.com/component-edge/download/datasheet/C0603C100J5GACAUTO.pdf, Device Class L1="Passive Components", Device Class L2=Capacitors, Device Class L3="Ceramic Capacitors", Digikey Description="CAP CER 0.1UF 50V X7R 0603", Height=0.87mm, Lead Free=Yes, Material=Ceramic, Octopart=https://octopart.com/c0603c104k5ractu-kemet-139244, RoHS=TRUE, Supplier 1="Arrow Electronics"
C2 C3 C5 C6 C8 C9 C10 C11 C12 C13 C14 C15 C16 C17 C18 C19 C20 C21 C22.1 C22.2 C22.3 C22.4 C25 C26 C27 C28 C29 C30 C31 C32 C34 C36 C39: "CAP CER 50V X7R 0603", Manufacturer=KEMET, Manufacturer Part Number=C0603C104K5RACTU, Package=C0603C-CF, Supplier Part Number 1=80-C0201C120K3G, Temperature="-55°C to +125°C", Temperature Characteristic=X7R, Temperature Coefficient=30ppm/°C, Temperature Range High=+125°C, Temperature Range Low=-55°C, Tolerance=0.1, Voltage Rating="50 V", Automotive=Yes, Automotive Grade="Grade 1", Category=Cap, ComponentLink2Description=Datasheet, ComponentLink2URL=https://api.kemet.com/component-edge/download/datasheet/C0603C100J5GACAUTO.pdf, Device Class L1="Passive Components", Device Class L2=Capacitors, Device Class L3="Ceramic Capacitors", Digikey Description="CAP CER 0.1UF 50V X7R 0603", Height=0.87mm, Lead Free=Yes, Material=Ceramic, Octopart=https://octopart.com/c0603c104k5ractu-kemet-139244, RoHS=TRUE, Supplier 1=Mouser
C4: "Large Current 3 Terminals Low ESL Chip Multilayer Ceramic Capacitors for General Purpose, 0603, 1uF, 20%, 6.3V", Capacitance=1uF, Case Code (Imperial)=0603, Case Code (Metric)=1608, Current=2A, DC Resistance (DCR)=30mR, Insulation Resistance=500MR, Max Operating Temperature=105°C, Max Voltage Rating (DC)=6.3V, Min Operating Temperature=-55°C, Package Quantity=1, Tolerance=20%, Case/Package=0603, Current Rating=2A, Depth=0.8mm, Height=0.6mm, Lead Free="Lead Free", Length=1.6mm, Max Current Rating=2A, Mount="Surface Mount", Packaging="Tape and Reel", Radiation Hardening=No, REACH SVHC="No SVHC", Supplier 1="Arrow Electronics", Supplier Part Number 1=NFM18PS105R0J3D, Termination=Flat, Voltage=6.3V, Voltage Rating=6.3V, Voltage Rating (DC)=6.3V, Weight=7.1E-05oz, Width=0.8mm
C23 C24: "CAP CER 50V X7R 0603", Manufacturer=KEMET, Manufacturer Part Number=C0603C104K5RACTU, Package=C0603C-CF, Supplier Part Number 1=CL10B104KB8NNNC, Temperature="-55°C to +125°C", Temperature Characteristic=X7R, Temperature Coefficient=30ppm/°C, Temperature Range High=+125°C, Temperature Range Low=-55°C, Tolerance=0.1, Voltage Rating="50 V", Automotive=Yes, Automotive Grade="Grade 1", Category=Cap, ComponentLink2Description=Datasheet, ComponentLink2URL=https://api.kemet.com/component-edge/download/datasheet/C0603C100J5GACAUTO.pdf, Device Class L1="Passive Components", Device Class L2=Capacitors, Device Class L3="Ceramic Capacitors", Digikey Description="CAP CER 0.1UF 50V X7R 0603", Height=0.87mm, Lead Free=Yes, Material=Ceramic, Octopart=https://octopart.com/c0603c104k5ractu-kemet-139244, RoHS=TRUE, Supplier 1="Arrow Electronics"
C41: "8 ~ 50pF Trimmer Capacitor 125 V Top Surface Mount"
D1 D2 D3: "LED GREEN CLEAR CHIP SMD", Case Code (Imperial)=0402, Case Code (Metric)=1005, Color=Green, Forward Voltage=2V, Lens Color=Colorless, Package Quantity=1, Supplier Part Number 1=754-1811-1-ND, Test Current=20mA, Case/Package=0402, Dominant Wavelength=571nm, Height=0.25mm, Lead Free="Lead Free", Length=1mm, Lens Transparency=Clear, Luminous Intensity=35mcd, Mount="Surface Mount", Packaging="Tape and Reel", Supplier 1=Digi-Key, Viewing Angle=120°, Width=0.5mm
FB1 FB2 FB3: "SMD EMI Suppression Ferrite Bead WE-CBF, Z = 600 Ohm", Supplier Part Number 1=732-4642-1-ND, ComponentLink1Description="Manufacturer Link", ComponentLink1URL=http://www.we-online.com, ComponentLink2Description=Datasheet, ComponentLink2URL=http://www.we-online.de/katalog/media/pdf/742792042.pdf, DatasheetVersion=Dec-2005, Impedance="600 Ohm", PackageDescription="Chip Inductor, 2-Leads, Body 2.0 x 1.2 mm", PackageReference=SMD-0805, PackageVersion=2005, Supplier 1=Digi-Key
J1 J2 J3 J4 J5 J6 J7 J8 J9 J10 J11 J12: "SMA Right-Angle PCB Jack Receptacle, Brass Body, Gold Plated, 50 Ohm, 5-Pin THD, RoHS, Tray", Manufacturer=Molex, Package Description="5-Pin Through Hole Device, Body 14.8 x 6.35 mm, Pitch 2.54 mm", Datasheet URL=http://www.molex.com/webdocs/datasheets/pdf/en-us/0731000114_RF_COAX_CONNECTORS.pdf, Datasheet Version=09/2016, Manufacturer URL=http://www.molex.com/, Mounting Technology=ThroughHole, Package Reference=731000114, Package URL=http://www.molex.com/pdm_docs/sd/731000114_sd.pdf
J13: "4 Position Receptacle Connector 0.100\" (2.54mm) Through Hole, Right Angle Tin, connector for DSD TECH HM-10 Bluetooth 4.0 BLE iBeacon UART Module with 4PIN Base Board for Arduino UNO R3 Mega 2560 Nan", Supplier Part Number 1=538-90148-1104, Supplier 1=Mouser
J14: "Header; Breakaway; 0.100 x 0.100 in.; PC Board; Dual; 6; 0.025 in.; 0.12 in.", Package=None, Centerline_Pitch="2.54 mm[.1 in]", Digi-Key_Part_Number=A121369-ND, Digi-Key_Purchase_URL=https://www.digikey.com/product-detail/en/te-connectivity-amp-connectors/5-146256-3/A121369-ND/1153559?utm_source=snapeda&utm_medium=aggregator&utm_campaign=symbol, EU_RoHS_Compliance=Compliant, MF="TE Connectivity", MP=5-146256-3, Number_of_Positions=6, Product_Type=Connector, SnapEDA_Link=https://www.snapeda.com/parts/5-146256-3/TE%20Connectivity/view-part/486039/?ref=snap, Supplier 1="Arrow Electronics", Supplier Part Number 1=5-146256-3, TE_purchase_URL=https://www.te.com/usa-en/product-5-146256-3.html?te_bu=Cor&te_type=disp&te_campaign=seda_glo_cor-seda-global-disp-prtnr-fy19-seda-model-bom-cta_sma-317_1&elqCampaignId=32493
J15: "PC Terminal Block, Pitch 6.35 mm, 1 x 2 Position, Height 21.5 mm, Tail Lenght 5.1 mm, RoHS, Bulk", Manufacturer="Phoenix Contact", Package Description="PC Terminal Block, Pitch 6.35 mm, 1 x 2 Position, Height 21.5 mm, Tail Lenght 5.1 mm", Datasheet URL=http://media.digikey.com/pdf/Data%20Sheets/Phoenix%20Contact%20PDFs/1714955.pdf, Datasheet Version=02/2010, Manufacturer URL=http://www.phoenixcontact.com/, Mounting Technology=ThroughHole, Package Reference=1714955, Supplier 1="Arrow Electronics", Supplier Part Number 1=1714955
L1 L2: "744762256A General Purpose Inductor, 0.56uH, 5%, 1 Element, Ceramic-Core, SMD, 1008", Ambient Temperature Range High=110°C, Ambient Temperature Range Low=-40°C, Case Code (Imperial)=1008, Case Code (Metric)=2520, Current Rating=310mA, DC Resistance (DCR)=1.5Ω, Frequency=100MHz, Inductance=560nH, Inductance Tolerance=5%, Max Operating Temperature=125°C, Resistance=1.17Ω, Self Resonant Frequency=430MHz, Supplier Part Number 1=732-1829-1-ND, Case/Package=1008, Composition="Ceramic, Wirewound", Core Material=Ceramic, Height=1.6mm, Height - Seated (Max)=1.905mm, Length=2.5mm, Material=Ceramic, Max DC Current=310mA, Min Operating Temperature=-40°C, Mount="Surface Mount", NexarPartId=23392503, Packaging=Digi-Reel®, Q Factor=45, REACH SVHC=Unknown, RoHS=Compliant, Series Resistance=1.5Ω, Shielding=Unshielded, Supplier 1=Digi-Key, Termination=SMD/SMT, Test Frequency=100MHz, Tolerance=5%, Weight=20mg, Width=2mm
R1 R2 R3 R4 R5 R6 R7 R8 R9 R10 R11 R12 R13 R14 R15 R16 R17 R18.1 R18.2 R18.3 R18.4 R19.1 R19.2 R19.3 R19.4 R20 R21 R22 R23 R24 R25 R30: library part "Resistor 0603", "Thick Film Resistor, 2.2 KOhm, 100 mW, 50 V, +/- 1%, -55 to 155 degC, 2-Pin SMD (0603), RoHS, Tape and Reel", Case Code - in=0603, Case Code - mm=1608, Manufacturer=Yageo, Operating Temperature Range=-55Cto+155C, Package Description="2-Pin Surface Mount Device, Body 1.6 x 0.8 mm", Power Rating=100mW, Temperature Coefficient=100PPM/C, Tolerance=1%, Voltage Rating=50V, Datasheet URL=http://www.yageo.com/documents/recent/PYu-RC_Group_51_RoHS_L_7.pdf, Datasheet Version="Rev. 7, 05/2017", Manufacturer URL=http://www.yageo.com/, Mounting Technology=SurfaceMount, Package Reference=0603, Packaging=Reel, Product=ThickFilmResistorsGeneralPurpose, Series=RC, Termination Style=SMD/SMT
R26 R27 R28 R29: library part "Resistor 0603", "Thick Film Resistor, 2.2 KOhm, 100 mW, 50 V, +/- 1%, -55 to 155 degC, 2-Pin SMD (0603), RoHS, Tape and Reel", Case Code - in=0603, Case Code - mm=1608, Manufacturer=Yageo, Operating Temperature Range=-55Cto+155C, Package Description="2-Pin Surface Mount Device, Body 1.6 x 0.8 mm", Power Rating=100mW, Temperature Coefficient=100PPM/C, Tolerance=0.1%, Voltage Rating=50V, Datasheet URL=http://www.yageo.com/documents/recent/PYu-RC_Group_51_RoHS_L_7.pdf, Datasheet Version="Rev. 7, 05/2017", Manufacturer URL=http://www.yageo.com/, Mounting Technology=SurfaceMount, Package Reference=0603, Packaging=Reel, Product=ThickFilmResistorsGeneralPurpose, Series=RC, Termination Style=SMD/SMT
SW1: "Tactile Switch SPST-NO Top Actuated Surface Mount", Package=None, Availability=Unavailable, MP=TS04-66-50-BK-260-SMT, Price=None
T1: "RF Balun 30kHz ~ 125MHz 50 / 50Ohm 6-SMD, Flat Leads", Supplier Part Number 1=3157-ADT1-6T+CT-ND, Supplier 1=Digi-Key
U1: "RFID Reader IC 13.56MHz FeliCa, ISO 14443, ISO 15693, ISO 18000-3, MIFARE, NFC SPI 2.7V ~ 5.5V 32-VFQFN Exposed Pad", Supplier Part Number 1=511-ST25R95-VMD5T, Supplier 1=Mouser
U2.1 U2.2 U2.3 U2.4: "RF Switch IC General Purpose SP4T 3 GHz 50Ohm 16-QFN (3x3)", Supplier Part Number 1=1046-1038-1-ND, Supplier 1=Digi-Key
U3: "IC MCU 32BIT 512KB FLASH 64LQFP", Ambient Temperature Range High=+85°C, Ambient Temperature Range Low=-40°C, Frequency=80MHz, Manufacturer=STMicroelectronics, Max Junction Temp=+105°C, Max Supply Voltage=3.6V, Min Supply Voltage=1.05V, Package=LQFP64, Supplier Part Number 1=511-STM32L452RET6P, Temperature="-40°C to +105°C", Automotive=No, Category=IC, ComponentLink2Description=Datasheet, ComponentLink2URL=https://www.st.com/resource/en/datasheet/stm32l452re.pdf, Core Architecture="ARM Cortex-M4", Data Bus Width=32bits, Device Class L1="Integrated Circuits (ICs)", Device Class L2="Embedded Processors and Controllers", Device Class L3=Microcontrollers, Digikey Description="IC MCU 32BIT 512KB FLASH 64LQFP", Height=1.6mm, Interface=I2C,SPI,UART,USART,CAN,USB,LIN,IrDA,Other, Lead Free=Yes, Manufacturer Part Number=STM32L452RET6P, Memory Size=512KBytes, Memory Type=FLASH, Number Of A/D Converters=1, Number Of Adc Channels=16, Number Of Cores=1, Number Of I2C Channels=4, Number Of I/Os=52, Number Of Pwm Channels=20, Number Of Spi Channels=3, Number Of Timers/Counters=8, Number Of Uart Channels=5, Number Of Usb Channels=1, Octopart=https://octopart.com/stm32l452ret6p-stmicroelectronics-82945027, Ram Size=160KBytes, RoHS=TRUE, Standoff Height=0.05mm, Supplier 1=Mouser, Temperature Range High=+105°C, Temperature Range Low=-40°C
U4 U5: "Linear Voltage Regulator IC Positive Adjustable 1 Output 500mA 8-SOIC", Supplier 1="Arrow Electronics", Supplier Part Number 1=NCP3334DADJR2G
Y1: "Crystal 27.12MHz ±10ppm 6pF SMD-4 2mm x 1.6mm", Case/Package=SMD/SMT, ESR (Equivalent Series Resistance)=100R, Frequency=27.12MHz, Frequency Stability=20ppm, Frequency Tolerance=10ppm, Load Capacitance=6pF, Max Operating Temperature=85°C, Min Operating Temperature=-40°C, Supplier Part Number 1=535-13879-1-ND, Mount="Surface Mount", Packaging="Tape and Reel", Supplier 1=Digi-Key
Y2: "Crystal 8MHz ±20ppm 18pF SMD-4 5mm x 3.2mm", Case/Package=CSMD, ESR (Equivalent Series Resistance)=200R, Frequency=8MHz, Frequency Stability=50ppm, Frequency Tolerance=20ppm, Load Capacitance=18pF, Max Operating Temperature=70°C, Min Operating Temperature=-20°C, Operating Frequency="8 MHz", Package Quantity=1000, Resistor Type=Ceramic, Supplier Part Number 1=2481760, Depth=3.2mm, Height=0.043inch, Lead Free="Lead Free", Length=5mm, Mount="Surface Mount", Number of Pins=4, Packaging="Tape and Reel", Series=ABM3B, Series Resistance=200R, Supplier 1="Future Electronics", Termination=SMD/SMT, Tolerance=20ppm, Width=0.126inch

## Via types
v1: diameter 0.45, hole 0.3, Top to Bottom, 131 vias

## Nets (pads, with @x,y where several pads share a name; then routed paths per layer and width w, separated by ;. In a path a pad name is that pad's centre, name@x,y a point inside that pad or via, vN(x,y) a via of type N, cw(c..) or ccw(c..) an arc to the next point about the centre after c; other vN are vias at no path point)
3V3: 3V3.1 C22.1.1 C22.2.1 C22.3.1 C22.4.1 C25.1 C26.1 C27.1 C28.1 C29.1 C30.1 C31.1 C32.1 C33.1 C36.1 C37.1 FB1.2 FB2.2 J14.5 R1.2 R2.2 R7.2 R16.2 R17.2 R18.1.2 R18.2.2 R18.3.2 R18.4.2 R19.1.2 R19.2.2 R19.3.2 R19.4.2 R26.2 U2.1.2 U2.2.2 U2.3.2 U2.4.2 U3.13 U3.19 U3.30 U3.32 U3.48 U3.62 U3.64 U4.5 U4.6 | length 56.2
  Top w0.254: C25.1@41.275,88.706 41.275,88.729 42.163,89.618 42.163,89.978 42.746,90.56 U3.64@43.196,90.56 ; C26.1@41.275,93.374 41.275,93.351 42.053,92.574 42.053,92.54 42.058,92.535 42.058,91.902 42.376,91.583 43.173,91.583 U3.62@43.196,91.56 ; C27.1@44.256,101.905 44.279,101.905 45.196,100.988 U3.48@45.196,100.06 ; U3.13@51.196,88.56 51.219,88.537 51.219,87.825 51.41,87.633 51.483,87.633 52.099,87.017 52.099,86.994 52.428,86.665 C32.1@52.451,86.665 ; U3.19@54.696,91.56 56.169,91.56 56.769,92.16 C30.1@56.769,92.183 ; U3.30@54.696,97.06 54.719,97.037 55.566,97.037 55.915,96.688 55.915,95.959 56.769,95.105 C29.1@56.769,95.082 ; U3.32@54.696,98.06 55.146,98.06 55.804,98.719 55.804,99.104 C28.1@56.769,100.069 ; v1(57.455,73.711) 58.333,73.711 R16.2@58.335,73.713 ; v1(57.506,78.41) 58.317,78.41 R17.2@58.335,78.392 ; U2.3.2@77.826,108.188 77.826,110.008 C22.3.1@78.038,110.221 ; C22.1.1@78.451,46.584 78.592,46.724 U2.1.2@78.592,48.621 ; U2.4.2@109.596,71.759 111.391,71.759 C22.4.1@111.633,71.517 ; U2.2.2@124.209,78.388 125.945,78.388 C22.2.1@126.263,78.07
  Top w0.508: C37.1@37.503,63.119 37.503,64.199 v1(37.516,64.211) ; v1(40.31,88.697) 40.319,88.706 C25.1@41.275,88.706 ; v1(40.31,93.37) 40.314,93.374 C26.1@41.275,93.374 ; v1(44.247,104.648) 44.256,104.638 C31.1@44.256,103.683 C27.1@44.256,101.905 ; v1(51.791,70.002) 52.6,70.002 R2.2@52.626,69.977 ; v1(51.816,68.402) 52.592,68.402 R1.2@52.626,68.368 ; C32.1@52.451,86.665 52.483,86.633 52.483,84.512 C33.1@52.515,84.48 52.553,84.443 v1(52.553,83.337) ; v1(55.55,65.862) 55.55,66.748 R7.2@55.561,66.76 ; C30.1@56.769,92.183 56.788,92.202 v1(57.633,92.202) 57.607,92.177 v1@57.556,92.177 ; C29.1@56.769,95.082 56.81,95.123 v1(57.709,95.123) ; C28.1@56.769,100.092 56.785,100.076 v1(57.633,100.076) ; FB2.2@67.343,57.991 67.343,59.113 v1(67.361,59.131) ; FB1.2@69.45,80.594 v1(70.485,80.594) ; R18.3.2@74.832,112.088 74.854,112.109 v1(74.854,112.827) ; v1(76.479,44.501) R19.1.2@77.227,44.501 ; v1(78.029,111.176) 78.038,111.166 C22.3.1@78.038,110.221 ; C22.1.1@78.451,46.584 78.486,46.549 v1(78.486,45.745) ; R19.3.2@79.237,112.446 79.262,112.471 v1(80.01,112.471) ; v1(81.61,43.815) R18.1.2@81.61,44.631 ; C22.4.1@111.633,71.517 111.674,71.476 v1(112.522,71.476) ; R18.4.2@113.357,74.6 v1(114.097,74.6) ; R19.4.2@113.894,70.318 113.919,70.318 v1(113.919,69.621) ; C22.2.1@126.263,78.07 126.279,78.054 v1(127.152,78.054) ; v1(128.524,76.048) 128.524,76.821 R19.2.2@128.549,76.846 ; R18.2.2@128.691,81.102 128.716,81.077 v1(129.388,81.077)
  other v1: 36.906,59.36 37.744,59.36 38.583,59.36